# Altium PCB ATRACK_Dongle_V2.PcbDoc
Units mil, origin at the board's own origin, x right, y up, seen from the top; angles counter-clockwise.
Board outline 1732.28 x 807.09 mil, 2 copper layers (Top Layer, Bottom Layer); 34 components, 28 nets, 135 pads, 11 vias.
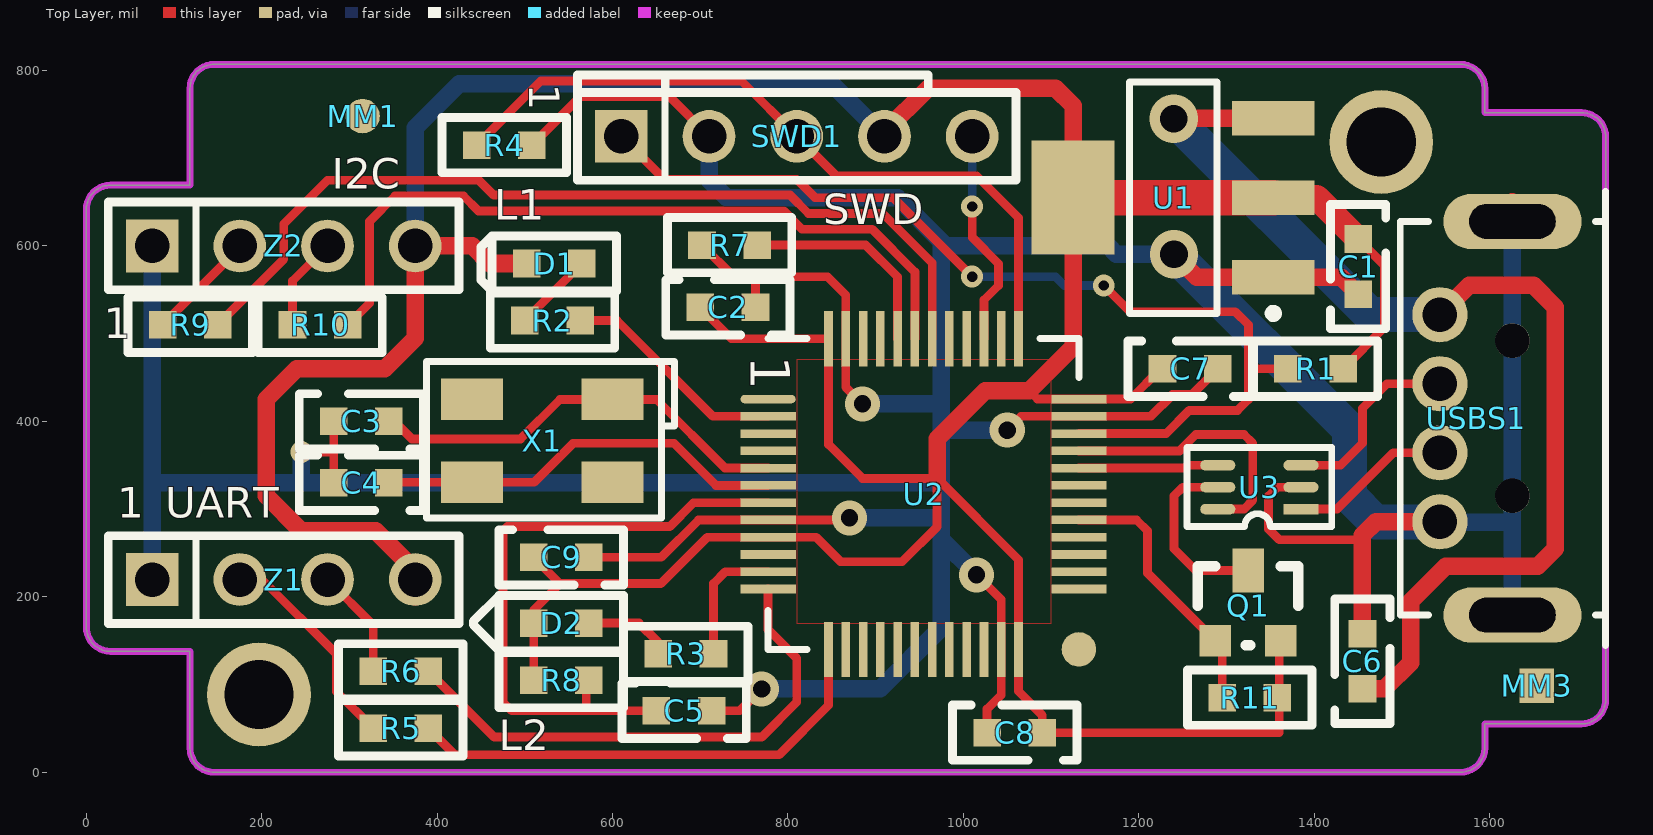
[diagram p0: Top Layer view]
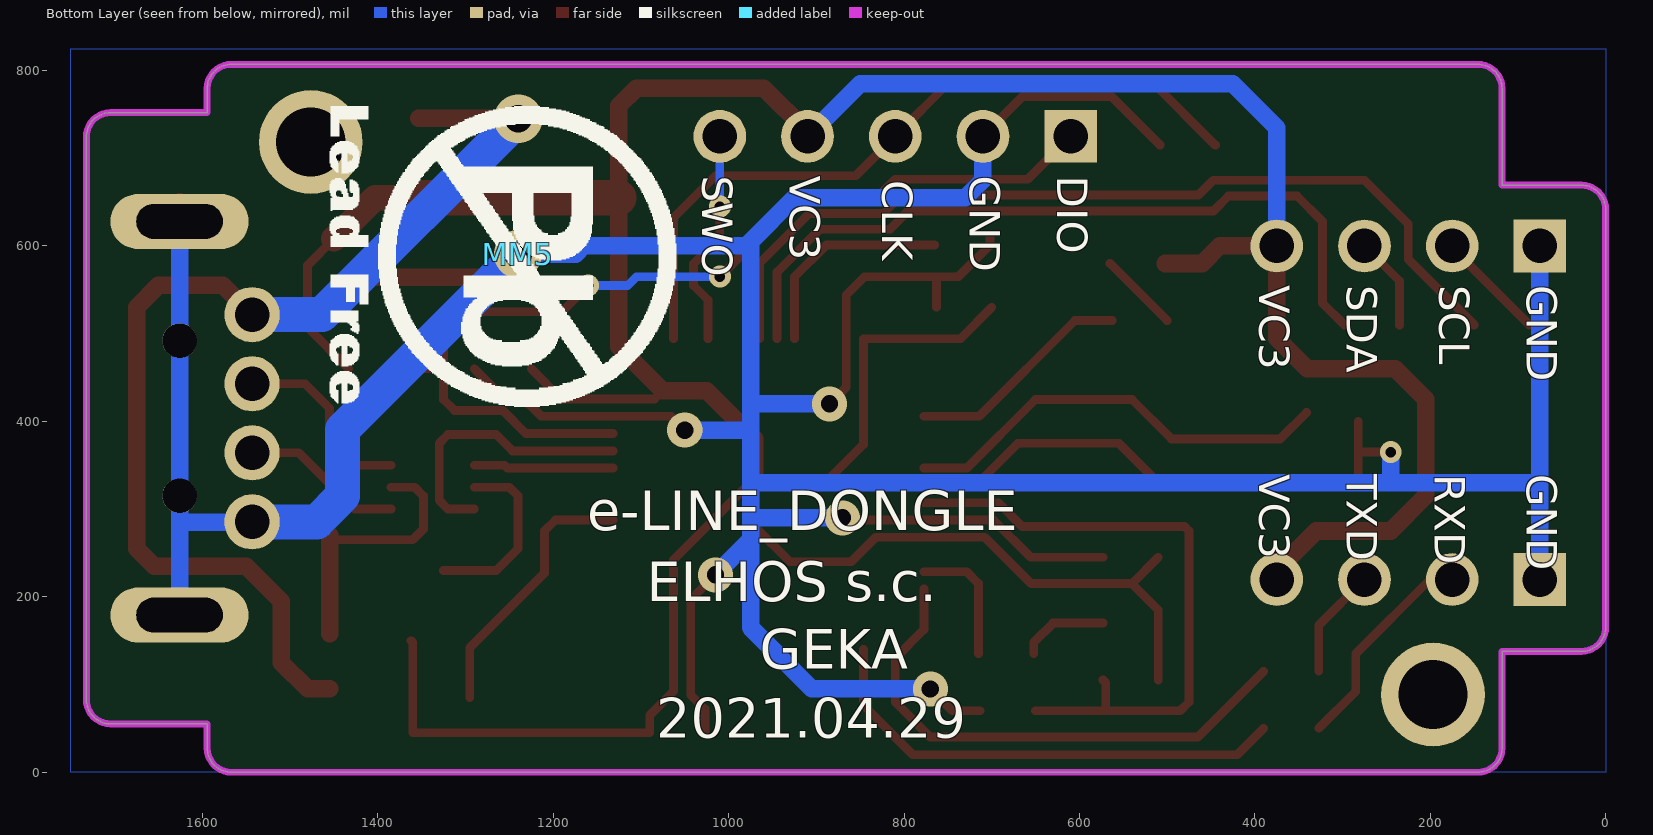
[diagram p1: Bottom Layer view, seen from below]

## Layer stack, top to bottom
Top Layer: signal copper 1.4
Dielectric: dielectric 12.6, FR-4, Dk 4.8
Bottom Layer: signal copper 1.4

## Board outline
118.11,27.56 118.11,137.8 27.56,137.8 cw(c27.56,165.35) 0,165.35 0,641.73 cw(c27.56,641.73) 27.56,669.29 118.11,669.29 118.11,779.53 cw(c145.67,779.53) 145.67,807.09 1566.93,807.09 cw(c1566.93,779.53) 1594.49,779.53 1594.49,751.97 1704.72,751.97 cw(c1704.72,724.41) 1732.28,724.41 1732.28,82.68 cw(c1704.72,82.68) 1704.72,55.12 1594.49,55.12 1594.49,27.56 cw(c1566.93,27.56) 1566.93,0 145.67,0 cw(c145.67,27.56)

## Design rules (kind name [scope] priority, off if disabled: settings)
Clearance [All] p1: gap=8
ComponentClearance [All] p1 off: gap=10 collisioncheckmode=3 verticalgap=10 showdistances=FALSE
HoleSize [All] p1: absolutevalues=TRUE maxlimit=100 minlimit=11.81 maxpercent=80.000 minpercent=20.000
MinimumSolderMaskSliver [All] p1: minsoldermaskwidth=4
PolygonConnect [All] p1: connectstyle=Relief reliefconductorwidth=10 reliefentries=4 polygonreliefangle="90 Angle"
RoutingVias [All] p1: holewidth=19.68 width=40 viastyle="Through Hole" minholewidth=11.81 minwidth=15 maxholewidth=78.74 maxwidth=200
SilkToSilkClearance [All] p1: silktosilkclearance=4
SilkscreenOverComponentPads [All] p1: minsilkscreentomaskgap=4
SolderMaskExpansion [All] p1: expansion=4
Width [All] p1: maxlimit=100 minlimit=8 preferedwidth=10 minimp=50.000000 maximp=50.000000 favimp=50.000000
23 further rules are at their usual default settings.

## Components (designator, comment, footprint, x,y, rotation, side; value= is the part's Value field where it differs from the comment)
C1 "1uF" 0603C 1450,611.93 r90 top
C2 "100n" 0603C 696.06,530 r180 top
C3 "12pF" 0603C 348.94,400 r0 top
C4 "12pF" 0603C 348.94,330 r0 top
C5 "10n" 0603C 646.06,70 r180 top
C6 "100n" 0603C 1455,91.06 r270 top
C7 "100n" 0603C 1223.07,460 r180 top
C8 "100n" 0603C 1093.94,45 r0 top
C9 "100n" 0603C 506.06,245 r180 top
D1 "" 0603LG 568.94,580 r0 top
D2 "" 0603LR 576.93,170 r0 top
MM1 "" REF_CIR 314.96,748.03 r0 top
MM3 "" REF_SQR 1653.54,98.43 r0 top
MM5 "" PB_FREE_GRAF 1240.16,590.55 r270 bottom
Q1 "IRLML6401" SOT23 1326,237 r90 top
R1 "10k" 0603R 1436.93,460 r0 top
R2 "1k" 0603R 496.06,515 r180 top
R3 "1k" 0603R 648.07,135 r180 top
R4 "10k" 0603R 511.93,715 r0 top
R5 "33R" 0603R 323.07,50 r180 top
R6 "33R" 0603R 323.07,115 r180 top
R7 "10k" 0603R 768.94,600.98 r0 top
R8 "10k" 0603R 506.06,105 r180 top
R9 "33R" 0603R 83.07,510 r180 top
R10 "33R" 0603R 231.06,510 r180 top
R11 "10k" 0603R 1291.06,85 r180 top
SWD1 "ST-LINK" PIN5_SWD 610,725 r0 top
U1 "LM1117MP-3.3" MP04A_N1 1353.35,564.45 r90 top
U2 "STM32F103C6Tx" LQFP48 777.36,425.43 r270 top
U3 "USBUF02W6" SOT323-6L 1385,300 r180 top
USBS1 "Header 5" USB_KR 1543.31,403.54 r90 top locked
X1 "ABM3B-8MHZ" XTAL3 600,425 r180 top
Z1 "CON4" PIN4 75,219.69 r0 top
Z2 "CON4" PIN4 75,600 r0 top

## Footprints (in the part's own frame and the unit in brackets; to place one, negate y for a bottom-side part, rotate by r counter-clockwise, add the part's x,y. Pads: shape width x height; smd on the part's side, far side on the other; paste and mask are expansions set on the pad)
0603C [mm]
  rect 0.8x0.8 smd: 1(-0.1,0) 2(-1.7,0)
  silkscreen extent -2.7,-0.8 0.9,0.8
0603LG [mm]
  rect 0.8x0.8 smd: A(-1.7,0) K(-0.1,0)
  silkscreen extent -3.03,-0.8 0.9,0.8
0603LR [mm]
  rect 0.8x0.8 smd: A(-1.7,0) K(-0.1,0)
  silkscreen extent -3.45,-0.8 0.9,0.8
0603R [mm]
  rect 0.8x0.8 smd: 1(-0.1,0) 2(-1.7,0)
  silkscreen extent -2.7,-0.8 0.9,0.8
LQFP48 [mm]
  oval 0.25x1.6 smd mask+0.152: 1(0,0)
  rect 0.25x1.6 smd mask+0.152: 2(0.5,0) 3(1,0) 4(1.5,0) 5(2,0) 6(2.5,0) 7(3,0) 8(3.5,0) 9(4,0) 10(4.5,0) 11(5,0) 12(5.5,0) 25(5.5,9) 26(5,9) 27(4.5,9) 28(4,9) 29(3.5,9) 30(3,9) 31(2.5,9) 32(2,9) 33(1.5,9) 34(1,9) 35(0.5,9) 36(0,9)
  rect 1.6x0.25 smd mask+0.152: 13(7.25,1.75) 14(7.25,2.25) 15(7.25,2.75) 16(7.25,3.25) 17(7.25,3.75) 18(7.25,4.25) 19(7.25,4.75) 20(7.25,5.25) 21(7.25,5.75) 22(7.25,6.25) 23(7.25,6.75) 24(7.25,7.25) 37(-1.75,7.25) 38(-1.75,6.75) 39(-1.75,6.25) 40(-1.75,5.75) 41(-1.75,5.25) 42(-1.75,4.75) 43(-1.75,4.25) 44(-1.75,3.75) 45(-1.75,3.25) 46(-1.75,2.75) 47(-1.75,2.25) 48(-1.75,1.75)
  round 1 smd paste-0.508 mask+0.5: ""(7.25,9)
  silkscreen extent -1.75,0 7.25,9
MP04A_N1 [mm]
  rect 1x2.4 smd: 1(0,0) 2(2.3,0) 3(4.6,0)
  rect 3.3x2.4 smd: 4(2.3,5.8)
  silkscreen extent -1.17,-0.12 5.65,4.17
PB_FREE_GRAF [mil]
  silkscreen extent -169,-215 174,181
PIN4 [mil]
  rect 60x60 hole 39.37: 1(0,0)
  round 60 hole 39.37: 2(100,0) 3(200,0) 4(300,0)
  silkscreen extent -50,-50 350,50
PIN5_SWD [mil]
  rect 60x60 hole 39.37: 1(0,0)
  round 60 hole 39.37: 2(100,0) 3(200,0) 4(300,0) 5(400,0)
  silkscreen extent -50,-50 450,70
REF_CIR [mm]
  round 1 smd paste-0.5 mask+0.5: 0(0,0)
REF_SQR [mm]
  rect 1x1 smd paste-0.5 mask+0.5: ""(0,0)
SOT23 [mil]
  rect 36x36 smd: 1(-87,39) 2(-87,-36)
  rect 50x36 smd: 3(-7,1)
  silkscreen extent -92,-56 -2,59
SOT323-6L [mil]
  rect 40x12 smd: 1(0,0)
  oval 40x12 smd: 2(0,-25) 3(0,-50) 4(95,-50) 5(95,-25) 6(95,0)
  silkscreen extent -35,-70 130,20
USB_KR [mm] "LUMBERG_2410-08"
  oval 1.6x4 hole 1 slot 2.5 at 90 deg: 0(-5.7,-2.1) 0(5.7,-2.1)
  round 1 hole 1: 0(-2.25,-2.1) 0(2.25,-2.1)
  round 1.6 hole 1: 1(3,0) 2(1,0) 3(-1,0) 4(-3,0)
  silkscreen extent -6.58,-4.8 6.58,1.15
XTAL3 [mm]
  rect 1.8x1.2 smd: 1(0,0) 2(4.069,0) 3(4.069,2.4) 4(0,2.4)
  silkscreen extent -1.79,-1.1 5.38,3.43

## Part data
C1 C2 C7 C8 C9: library part CAP
C3 C4 C5 C6: library part CAP, "Capacitor"
D1 D2: library part LED
MM1 MM3 MM5: library part MECH
Q1: library part IRLML9303, "Low Charge N-Channel MOSFET"
R1 R2 R3 R4 R7 R8 R11: library part RES3
R5 R6 R9 R10: library part RES1
SWD1: library part SW5_CON, "Header, 4-Pin"
U1: "800mA Low-Dropout Linear Regulator"
U2: library part STM32F103_LQFP48, "STM32F103CxTx"
U3: library part USBUF01W6
USBS1: "Header, 5-Pin"
X1: library part CRYSTAL, "Crystal"
Z1 Z2: "Connector"

## Free pads (board coordinates)
  round 118.11 hole 78.74: 0(196.85,88.58) 0(1476.38,718.5)

## Via types
v1: diameter 40, hole 19.68, Top Layer to Bottom Layer, tented both sides, 5 vias
v2: diameter 25, hole 11.81, Top Layer to Bottom Layer, tented both sides, 4 vias
v3: diameter 55.12, hole 31.5, Top Layer to Bottom Layer, tented both sides, 2 vias

## Nets (pads, with @x,y where several pads share a name; then routed paths per layer and width w, separated by ;. In a path a pad name is that pad's centre, name@x,y a point inside that pad or via, vN(x,y) a via of type N, cw(c..) or ccw(c..) an arc to the next point about the centre after c; other vN are vias at no path point)
A_SCL: R9.2 U2.42 | length 1031.5
  Top Layer w10: R9.2 225,585 225,625 275,675 447.5,675 464.5,658 802.46,658 823.47,636.98 908.02,636.98 964.37,580.63 U2.42
A_SDA: R10.2 U2.43 | length 873.9
  Top Layer w10: R10.2 322.99,535 322.99,627.99 352,657 430,657 447,640 795,640 816.02,618.98 896.02,618.98 944.69,570.31 U2.43
BOOT0: R7.1 U2.44 | length 245.3
  Top Layer w10: R7.1 888.56,600.98 925,564.54 U2.44
GND: C1.2 C2.2 C3.2 C4.2 C5.2 C6.2 C7.2 C8.2 C9.2 R4.1 R7.2 SWD1.2 U1.1 U2.8 U2.23 U2.35 U2.47 U3.2 USBS1.0 USBS1.4 Z1.1 Z2.1 | length 6172.4
  Top Layer w10: v2(245,365) 282.01,365 ; C4.2 282.01,365 ; C3.2 282.01,365 ; R4.1 562.99,770 665,770 SWD1.2 ; C9.2 655.46,245 698.09,287.64 U2.8 867.64,287.64 v1(870,290) ; R7.2@702.01,610 R7.2 737.99,565 760,565 ; C5.2 745,70 v1(770,95) ; C2.2 762.99,562.01 760,565 ; v1(885,420) 865.94,439.06 U2.47 865.94,544.06 845,565 760,565 ; v1(1015,225) 1043.11,196.89 U2.23 1043.11,88.11 1027.01,72.01 C8.2 ; v1(1050,390) 1065.75,405.75 U2.35 1213.74,405.75 1238.49,430.5 1260.5,430.5 C7.2 ; U3.2 1358,325 1348,315 1348,277 1360,265 1450,265 1455,270
  Top Layer w20: v3(1240.16,590.55) 1266.26,564.45 U1.1 1430.55,564.45 C1.2 ; C6.2 1455,270 1470.43,285.43 USBS1.4 ; USBS1.0@1625.98,627.95 USBS1.0@1625.98,650.59
  Bottom Layer w20: Z1.1@75,200 Z1.1 75,330 ; Z2.1 75,330 ; v2(245,365) 245,330 ; SWD1.2 710,675 730,655 925,655 975,605 ; v1(770,95) 905,95 975,165 975,265 ; v1(870,290) 975,290 ; v1(885,420) 975,420 ; v1(1015,225) 975,265 ; v1(1050,390) 975,390 ; v3(1240.16,590.55) 1174.45,590.55 1165,600 980,600 975,605 ; USBS1.4@1543.74,285 1625.98,285 ; USBS1.0@1625.98,179.13 1625.98,285 ; USBS1.0@1625.98,627.95 1625.98,492.13 1625.98,314.96 1625.98,285 ; 75,330 245,330 ; 245,330 975,330 ; 975,265 975,290 ; 975,290 975,330 ; 975,330 975,390 ; 975,390 975,420 ; 975,420 975,605
  Bottom Layer w40: v3(1240.16,590.55) 1440,390.71 1440,315 1469.57,285.43 USBS1.4
LED1: R2.2 U2.2 | length 259.6
  Top Layer w10: R2.2 605,515 714.25,405.75 U2.2
LED2: R3.2 U2.11 | length 148
  Top Layer w10: R3.2 715,215 728.58,228.58 U2.11
NetC3_1: C3.1 U2.5 X1.1 | length 499.8
  Top Layer w10: C3.1@341.06,410 371.06,380 495,380 540,425 X1.1 650,425 728.31,346.69 U2.5
NetC4_1: C4.1 U2.6 X1.3 | length 470.9
  Top Layer w10: C4.1 345.51,330.51 X1.3 510.51,330.51 555,375 670,375 717.99,327.01 U2.6
NetD1_K: D1.K R2.1 | length 91.9
  Top Layer w10: R2.1 D1.K
NetD2_K: D2.K R3.1 | length 101.1
  Top Layer w10: D2.K 630,170 652.01,147.99 R3.1
NetR5_1: R5.1 Z1.2 | length 247.5
  Top Layer w10: Z1.2 200.31,219.69 285,135 285,92.01 R5.1
NetR6_1: R6.1 Z1.3 | length 126.2
  Top Layer w10: Z1.3 327.01,167.68 R6.1
NetR9_1: R9.1 Z2.2 | length 126.4
  Top Layer w10: R9.1 175,597.99 Z2.2
NetR10_1: R10.1 Z2.3 | length 106.6
  Top Layer w10: R10.1 235,560 Z2.3
RESET: C5.1 R8.2 U2.7 | length 726.1
  Top Layer w10: R8.2 570,102.01 570,70 ; C5.1 570,70 ; U2.7 692.32,307.32 665,280 480,280 475,275 475,80 485,70 570,70
RXD0: R5.2 U2.13 | length 555.7
  Top Layer w10: R5.2 420,20 790,20 846.26,76.26 U2.13
SWCLK: R4.2 SWD1.3 U2.37 | length 850.4
  Top Layer w10: R4.2 518,788 747,788 SWD1.3 855,680 1015,680 1062.8,632.2 U2.37
SWDIO: R1.2 SWD1.1 U2.34 | length 1143.5
  Top Layer w10: SWD1.1 659,676 809.91,676 830.91,655 920,655 v2(1010,565) ; U2.34 1231.06,386.06 1257.5,412.5 1312.5,412.5 1325,425 1325,460 ; v2(1160,555) 1190,525 1310,525 1325,510 1325,460 ; R1.2 1325,460
  Bottom Layer w10: v2(1010,565) 1105,565 1115,555 v2(1160,555)
SWO: SWD1.5 U2.39 | length 250
  Top Layer w10: v2(1010,645) 1010,609.8 1040,579.8 1040,555 1023.43,538.43 U2.39
  Bottom Layer w10: v2(1010,645) SWD1.5
TXD0: R6.2 U2.12 | length 610.1
  Top Layer w10: R6.2 465,40 770,40 810,80 810,130 777.36,162.64 U2.12
USB_ON: Q1.1 R11.1 U2.29 | length 308.8
  Top Layer w10: U2.29 1197.36,287.64 1210,275 1210,227 Q1.1 1295,142 R11.1
USBDN: U2.32 U3.4 | length 159.7
  Top Layer w10: U2.32 1252.15,346.69 1255.46,350 U3.4
USBDP: U2.33 U3.6 | length 319.3
  Top Layer w10: U2.33 1246.38,366.38 1265,385 1320,385 1330,375 1330,310 1320,300 U3.6
USBN: U3.3 USBS1.2 | length 220.2
  Top Layer w10: U3.3 1430,350 1455,375 1455,415 1482.91,442.91 USBS1.2
USBP: U3.1 USBS1.3 | length 184.9
  Top Layer w10: U3.1 1425.85,300 1490.02,364.17 USBS1.3
V_STER: Q1.3 U3.5 | length 209.5
  Top Layer w10: U3.5 1250,325 1240,315 1240,255 1265,230 Q1.3
VC3: C1.1 C2.1 C7.1 C8.1 C9.1 D1.A D2.A Q1.2 R1.1 R8.1 R11.2 SWD1.4 U1.2 U1.4 U2.9 U2.24 U2.36 U2.48 Z1.4 Z2.4 | length 4797.1
  Top Layer w10: R8.1 D2.A 510,185 540,215 ; C9.1 540,215 ; C2.1 735.67,494.33 U2.48 846.26,373.74 885,335 970,335 ; 1075,435 1084.57,425.43 U2.36 1190.43,425.43 C7.1@1225,460 ; Q1.2 1360,148 1360,45 C8.1 1090,65 1062.8,92.2 U2.24 1062.8,242.2 970,335 ; R1.1 1480,507.01 1480,577.99 C1.1 ; 540,215 655,215 707.95,267.95 U2.9 832.05,267.95 860,240 930,240 970,280 970,335
  Top Layer w20: Z1.4@375,200 Z1.4 375,230 330,275 245,275 205,315 205,425 240,460 340,460 375,495 Z2.4 440,600 460,580 D1.A ; SWD1.4 910,730 960,780 1105,780 1125,760 U1.4 1125,485 1075,435 1025,435 970,380 970,335
  Top Layer w29: U1.2 1402.99,655 C1.1
  Top Layer w40: U1.4 U1.2
  Bottom Layer w20: Z2.4 375,735 425,785 850,785 SWD1.4
VC5: C6.1 U1.3 USBS1.1 | length 1267.5
  Top Layer w20: v3(1240,745) 1240.55,745.55 U1.3 ; C6.1 1480,95 1510,125 1510,195 1550,235 1655,235 1675,255 1675,530 1650,555 1576.65,555 USBS1.1
  Bottom Layer w40: v3(1240,745) 1463.35,521.65 USBS1.1
pads on no net: MM1.0 MM3. U2. U2.1 U2.3 U2.4 U2.10 U2.14 U2.15 U2.16 U2.17 U2.18 U2.19 U2.20 U2.21 U2.22 U2.25 U2.26 U2.27 U2.28 U2.30 U2.31 U2.38 U2.40 U2.41 U2.45 U2.46 X1.2 X1.4

## Polygon pours and split planes (outlines as drawn)
GND on Bottom Layer "PGND" (solid, remove dead copper, shelved, pour order 4): 0,825 0,0 1750,0 1750,825
VC3 on Top Layer "PVC3" (solid, shelved, pour order 2): 810,465 810,170 1100,170 1100,470 810,470

## Keep-outs
Keep-Out Layer:
  the board outline again, w7.87

## Silkscreen, mask and mechanical layers (free items; w line width, h text height)
Top Overlay:
  text "1" at 505,785 h35 r270
  text "I2C" at 280,665 h35
  text "L1" at 465,630 h35
  text "SWD" at 840,625 h35
  text "1" at 20,495 h35
  text "1" at 35,290 h35
  text "UART" at 90,290 h35
  text "L2" at 470,25 h35
Bottom Overlay:
  text "DIO" at 625,680 h35 r90
  text "GND" at 725,680 h35 r90
  text "VC3" at 930,680 h35 r90
  text "SWO" at 1030,680 h35 r90
  text "CLK" at 825,675 h35 r90
  text "GND" at 90,555 h35 r90
  text "SCL" at 190,555 h35 r90
  text "SDA" at 295,555 h35 r90
  text "VC3" at 395,555 h35 r90
  text "GND" at 90,340 h35 r90
  text "RXD" at 195,340 h35 r90
  text "TXD" at 295,340 h35 r90
  text "VC3" at 395,340 h35 r90
  text "e-LINE_DONGLE" at 1161.42,275.59 h45
  text "ELHOS s.c." at 1093.39,194.92 h45
  text "GEKA" at 964.57,118.11 h45
  text "2021.04.29" at 1082.68,39.37 h45
Mechanical 1:
  the board outline again, w7.87
Mechanical 15:
  lines w7.87: 1732.28,403.54 1786.42,403.54

## Text inside footprints (layer, text, board x,y; h text height)
U2: Top Overlay "1" at 757.68,474.65 h45 r270